# EAGLE board SOIC8 to DIP - Mutliple (EAGLE 6.4), part 1 of 2
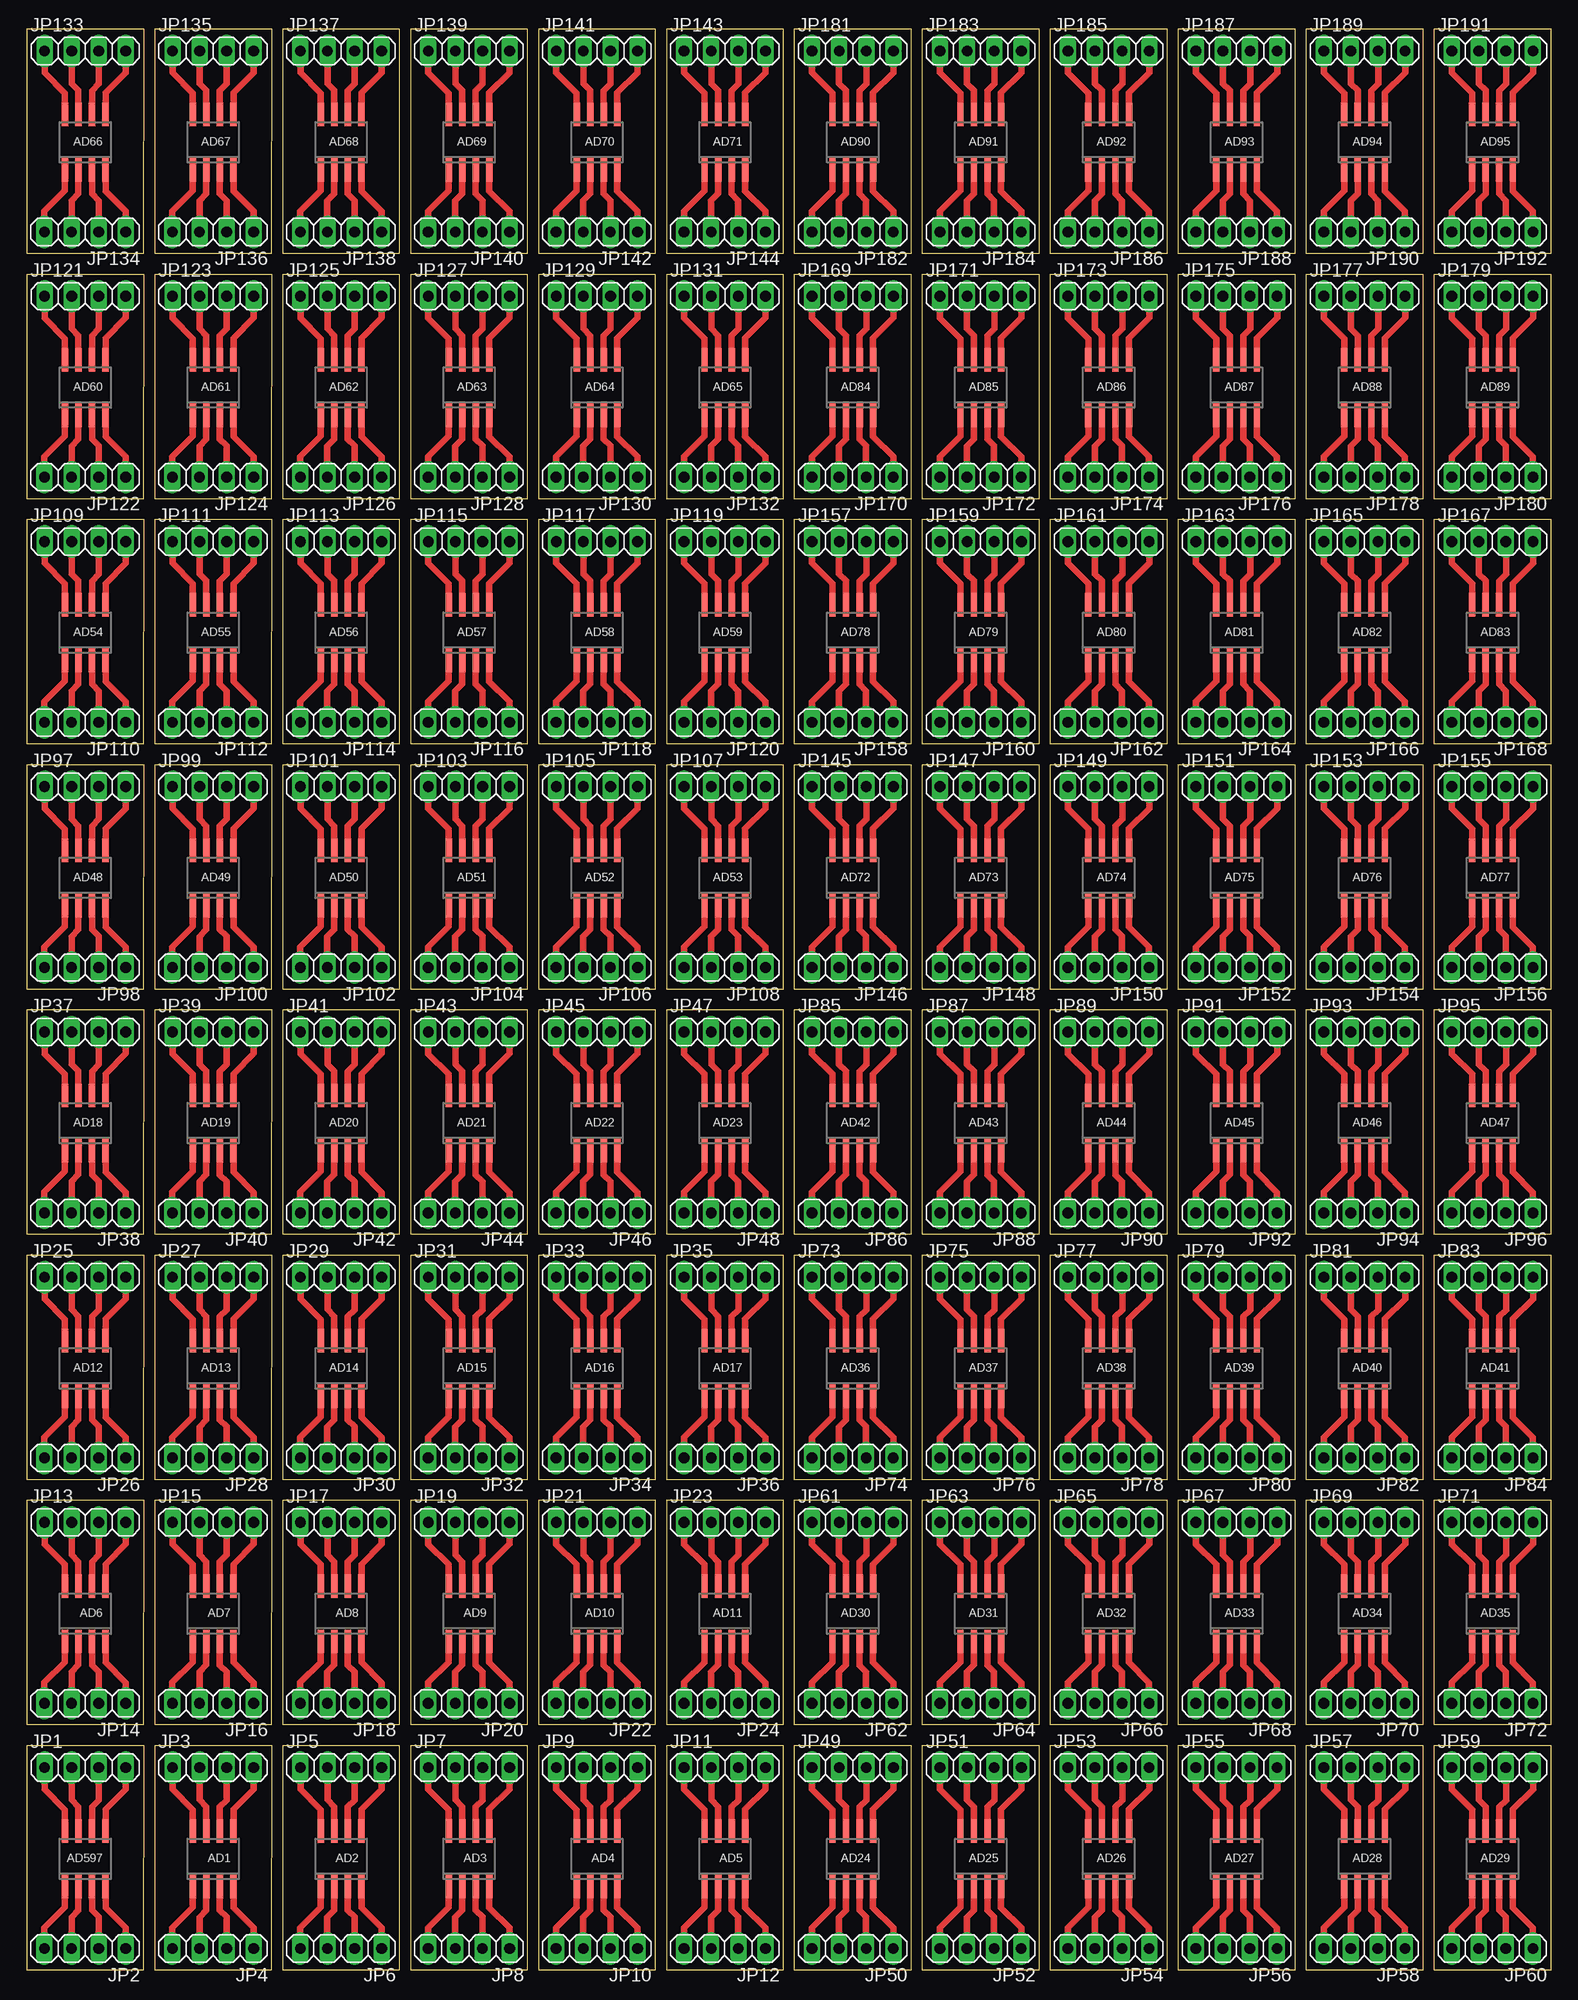
[diagram p0: board, top side]

Size 143.01 x 182 mm. Coordinates in mm from the lower left corner, seen from the top.
Outline: 0,0 11,0 11.01,21 0,21 0,0
Outline: 12,0 23,0 23.01,21 12,21 12,0
Outline: 24,0 35,0 35.01,21 24,21 24,0
Outline: 36,0 47,0 47.01,21 36,21 36,0
Outline: 48,0 59,0 59.01,21 48,21 48,0
Outline: 60,0 71,0 71.01,21 60,21 60,0
Outline: 0,23 11,23 11.01,44 0,44 0,23
Outline: 12,23 23,23 23.01,44 12,44 12,23
Outline: 24,23 35,23 35.01,44 24,44 24,23
Outline: 36,23 47,23 47.01,44 36,44 36,23
Outline: 48,23 59,23 59.01,44 48,44 48,23
Outline: 60,23 71,23 71.01,44 60,44 60,23
Outline: 0,46 11,46 11.01,67 0,67 0,46
Outline: 12,46 23,46 23.01,67 12,67 12,46
Outline: 24,46 35,46 35.01,67 24,67 24,46
Outline: 36,46 47,46 47.01,67 36,67 36,46
Outline: 48,46 59,46 59.01,67 48,67 48,46
Outline: 60,46 71,46 71.01,67 60,67 60,46
Outline: 0,69 11,69 11.01,90 0,90 0,69
Outline: 12,69 23,69 23.01,90 12,90 12,69
Outline: 24,69 35,69 35.01,90 24,90 24,69
Outline: 36,69 47,69 47.01,90 36,90 36,69
Outline: 48,69 59,69 59.01,90 48,90 48,69
Outline: 60,69 71,69 71.01,90 60,90 60,69
Outline: 72,0 83,0 83.01,21 72,21 72,0
Outline: 84,0 95,0 95.01,21 84,21 84,0
Outline: 96,0 107,0 107.01,21 96,21 96,0
Outline: 108,0 119,0 119.01,21 108,21 108,0
Outline: 120,0 131,0 131.01,21 120,21 120,0
Outline: 132,0 143,0 143.01,21 132,21 132,0
Outline: 72,23 83,23 83.01,44 72,44 72,23
Outline: 84,23 95,23 95.01,44 84,44 84,23
Outline: 96,23 107,23 107.01,44 96,44 96,23
Outline: 108,23 119,23 119.01,44 108,44 108,23
Outline: 120,23 131,23 131.01,44 120,44 120,23
Outline: 132,23 143,23 143.01,44 132,44 132,23
Outline: 72,46 83,46 83.01,67 72,67 72,46
Outline: 84,46 95,46 95.01,67 84,67 84,46
Outline: 96,46 107,46 107.01,67 96,67 96,46
Outline: 108,46 119,46 119.01,67 108,67 108,46
Outline: 120,46 131,46 131.01,67 120,67 120,46
Outline: 132,46 143,46 143.01,67 132,67 132,46
Outline: 72,69 83,69 83.01,90 72,90 72,69
Outline: 84,69 95,69 95.01,90 84,90 84,69
Outline: 96,69 107,69 107.01,90 96,90 96,69
Outline: 108,69 119,69 119.01,90 108,90 108,69
Outline: 120,69 131,69 131.01,90 120,90 120,69
Outline: 132,69 143,69 143.01,90 132,90 132,69
Outline: 0,92 11,92 11.01,113 0,113 0,92
Outline: 12,92 23,92 23.01,113 12,113 12,92
Outline: 24,92 35,92 35.01,113 24,113 24,92
Outline: 36,92 47,92 47.01,113 36,113 36,92
Outline: 48,92 59,92 59.01,113 48,113 48,92
Outline: 60,92 71,92 71.01,113 60,113 60,92
Outline: 0,115 11,115 11.01,136 0,136 0,115
Outline: 12,115 23,115 23.01,136 12,136 12,115
Outline: 24,115 35,115 35.01,136 24,136 24,115
Outline: 36,115 47,115 47.01,136 36,136 36,115
Outline: 48,115 59,115 59.01,136 48,136 48,115
Outline: 60,115 71,115 71.01,136 60,136 60,115
Outline: 0,138 11,138 11.01,159 0,159 0,138
Outline: 12,138 23,138 23.01,159 12,159 12,138
Outline: 24,138 35,138 35.01,159 24,159 24,138
Outline: 36,138 47,138 47.01,159 36,159 36,138
Outline: 48,138 59,138 59.01,159 48,159 48,138
Outline: 60,138 71,138 71.01,159 60,159 60,138
Outline: 0,161 11,161 11.01,182 0,182 0,161
Outline: 12,161 23,161 23.01,182 12,182 12,161
Outline: 24,161 35,161 35.01,182 24,182 24,161
Outline: 36,161 47,161 47.01,182 36,182 36,161
Outline: 48,161 59,161 59.01,182 48,182 48,161
Outline: 60,161 71,161 71.01,182 60,182 60,161
Outline: 72,92 83,92 83.01,113 72,113 72,92
Outline: 84,92 95,92 95.01,113 84,113 84,92
Outline: 96,92 107,92 107.01,113 96,113 96,92
Outline: 108,92 119,92 119.01,113 108,113 108,92
Outline: 120,92 131,92 131.01,113 120,113 120,92
Outline: 132,92 143,92 143.01,113 132,113 132,92
Outline: 72,115 83,115 83.01,136 72,136 72,115
Outline: 84,115 95,115 95.01,136 84,136 84,115
Outline: 96,115 107,115 107.01,136 96,136 96,115
Outline: 108,115 119,115 119.01,136 108,136 108,115
Outline: 120,115 131,115 131.01,136 120,136 120,115
Outline: 132,115 143,115 143.01,136 132,136 132,115
Outline: 72,138 83,138 83.01,159 72,159 72,138
Outline: 84,138 95,138 95.01,159 84,159 84,138
Outline: 96,138 107,138 107.01,159 96,159 96,138
Outline: 108,138 119,138 119.01,159 108,159 108,138
Outline: 120,138 131,138 131.01,159 120,159 120,138
Outline: 132,138 143,138 143.01,159 132,159 132,138
Outline: 72,161 83,161 83.01,182 72,182 72,161
Outline: 84,161 95,161 95.01,182 84,182 84,161
Outline: 96,161 107,161 107.01,182 96,182 96,161
Outline: 108,161 119,161 119.01,182 108,182 108,161
Outline: 120,161 131,161 131.01,182 120,182 120,161
Outline: 132,161 143,161 143.01,182 132,182 132,161
Copper layers (1*16): Top 0.035mm / dielectric 1.5mm / Bottom 0.035mm
Design rules "default": minimum track width 10mil, minimum drill 24mil, track to track 8mil, track to pad 8mil, pad to pad 8mil, via to via 8mil, smd to smd 8mil, copper to edge 40mil, drill to drill 8mil, minimum pad ring 10mil, minimum via ring 8mil, stop-mask expansion 4mil, vias tented up to drill 0mil, thermal gap 10mil

## Footprints (pad centres in the part's own frame; a part is rotated, then mirrored left to right if it is on the bottom)
SO8 = smd 0.6 x 2.2: 1 -1.905,-2.6; 2 -0.635,-2.6; 3 0.635,-2.6; 4 1.905,-2.6; 5 1.905,2.6; 6 0.635,2.6; 7 -0.635,2.6; 8 -1.905,2.6
1X04 = drill 1.016 long: 1 -3.81,0; 2 -1.27,0; 3 1.27,0; 4 3.81,0

## Placement (x,y rotation side)
AD1  AD597  [SO8]  17.49,10.4 0 top
AD2  AD597  [SO8]  29.49,10.4 0 top
AD3  AD597  [SO8]  41.49,10.4 0 top
AD4  AD597  [SO8]  53.49,10.4 0 top
AD5  AD597  [SO8]  65.49,10.4 0 top
AD6  AD597  [SO8]  5.49,33.4 0 top
AD7  AD597  [SO8]  17.49,33.4 0 top
AD8  AD597  [SO8]  29.49,33.4 0 top
AD9  AD597  [SO8]  41.49,33.4 0 top
AD10  AD597  [SO8]  53.49,33.4 0 top
AD11  AD597  [SO8]  65.49,33.4 0 top
AD12  AD597  [SO8]  5.49,56.4 0 top
AD13  AD597  [SO8]  17.49,56.4 0 top
AD14  AD597  [SO8]  29.49,56.4 0 top
AD15  AD597  [SO8]  41.49,56.4 0 top
AD16  AD597  [SO8]  53.49,56.4 0 top
AD17  AD597  [SO8]  65.49,56.4 0 top
AD18  AD597  [SO8]  5.49,79.4 0 top
AD19  AD597  [SO8]  17.49,79.4 0 top
AD20  AD597  [SO8]  29.49,79.4 0 top
AD21  AD597  [SO8]  41.49,79.4 0 top
AD22  AD597  [SO8]  53.49,79.4 0 top
AD23  AD597  [SO8]  65.49,79.4 0 top
AD24  AD597  [SO8]  77.49,10.4 0 top
AD25  AD597  [SO8]  89.49,10.4 0 top
AD26  AD597  [SO8]  101.49,10.4 0 top
AD27  AD597  [SO8]  113.49,10.4 0 top
AD28  AD597  [SO8]  125.49,10.4 0 top
AD29  AD597  [SO8]  137.49,10.4 0 top
AD30  AD597  [SO8]  77.49,33.4 0 top
AD31  AD597  [SO8]  89.49,33.4 0 top
AD32  AD597  [SO8]  101.49,33.4 0 top
AD33  AD597  [SO8]  113.49,33.4 0 top
AD34  AD597  [SO8]  125.49,33.4 0 top
AD35  AD597  [SO8]  137.49,33.4 0 top
AD36  AD597  [SO8]  77.49,56.4 0 top
AD37  AD597  [SO8]  89.49,56.4 0 top
AD38  AD597  [SO8]  101.49,56.4 0 top
AD39  AD597  [SO8]  113.49,56.4 0 top
AD40  AD597  [SO8]  125.49,56.4 0 top
AD41  AD597  [SO8]  137.49,56.4 0 top
AD42  AD597  [SO8]  77.49,79.4 0 top
AD43  AD597  [SO8]  89.49,79.4 0 top
AD44  AD597  [SO8]  101.49,79.4 0 top
AD45  AD597  [SO8]  113.49,79.4 0 top
AD46  AD597  [SO8]  125.49,79.4 0 top
AD47  AD597  [SO8]  137.49,79.4 0 top
AD48  AD597  [SO8]  5.49,102.4 0 top
AD49  AD597  [SO8]  17.49,102.4 0 top
AD50  AD597  [SO8]  29.49,102.4 0 top
AD51  AD597  [SO8]  41.49,102.4 0 top
AD52  AD597  [SO8]  53.49,102.4 0 top
AD53  AD597  [SO8]  65.49,102.4 0 top
AD54  AD597  [SO8]  5.49,125.4 0 top
AD55  AD597  [SO8]  17.49,125.4 0 top
AD56  AD597  [SO8]  29.49,125.4 0 top
AD57  AD597  [SO8]  41.49,125.4 0 top
AD58  AD597  [SO8]  53.49,125.4 0 top
AD59  AD597  [SO8]  65.49,125.4 0 top
AD60  AD597  [SO8]  5.49,148.4 0 top
AD61  AD597  [SO8]  17.49,148.4 0 top
AD62  AD597  [SO8]  29.49,148.4 0 top
AD63  AD597  [SO8]  41.49,148.4 0 top
AD64  AD597  [SO8]  53.49,148.4 0 top
AD65  AD597  [SO8]  65.49,148.4 0 top
AD66  AD597  [SO8]  5.49,171.4 0 top
AD67  AD597  [SO8]  17.49,171.4 0 top
AD68  AD597  [SO8]  29.49,171.4 0 top
AD69  AD597  [SO8]  41.49,171.4 0 top
AD70  AD597  [SO8]  53.49,171.4 0 top
AD71  AD597  [SO8]  65.49,171.4 0 top
AD72  AD597  [SO8]  77.49,102.4 0 top
AD73  AD597  [SO8]  89.49,102.4 0 top
AD74  AD597  [SO8]  101.49,102.4 0 top
AD75  AD597  [SO8]  113.49,102.4 0 top
AD76  AD597  [SO8]  125.49,102.4 0 top
AD77  AD597  [SO8]  137.49,102.4 0 top
AD78  AD597  [SO8]  77.49,125.4 0 top
AD79  AD597  [SO8]  89.49,125.4 0 top
AD80  AD597  [SO8]  101.49,125.4 0 top
AD81  AD597  [SO8]  113.49,125.4 0 top
AD82  AD597  [SO8]  125.49,125.4 0 top
AD83  AD597  [SO8]  137.49,125.4 0 top
AD84  AD597  [SO8]  77.49,148.4 0 top
AD85  AD597  [SO8]  89.49,148.4 0 top
AD86  AD597  [SO8]  101.49,148.4 0 top
AD87  AD597  [SO8]  113.49,148.4 0 top
AD88  AD597  [SO8]  125.49,148.4 0 top
AD89  AD597  [SO8]  137.49,148.4 0 top
AD90  AD597  [SO8]  77.49,171.4 0 top
AD91  AD597  [SO8]  89.49,171.4 0 top
AD92  AD597  [SO8]  101.49,171.4 0 top
AD93  AD597  [SO8]  113.49,171.4 0 top
AD94  AD597  [SO8]  125.49,171.4 0 top
AD95  AD597  [SO8]  137.49,171.4 0 top
AD597  AD597  [SO8]  5.49,10.4 0 top
JP1  [1X04]  5.49,18.96 0 top
JP2  [1X04]  5.48,1.99 180 top
JP3  [1X04]  17.49,18.96 0 top
JP4  [1X04]  17.48,1.99 180 top
JP5  [1X04]  29.49,18.96 0 top
JP6  [1X04]  29.48,1.99 180 top
JP7  [1X04]  41.49,18.96 0 top
JP8  [1X04]  41.48,1.99 180 top
JP9  [1X04]  53.49,18.96 0 top
JP10  [1X04]  53.48,1.99 180 top
JP11  [1X04]  65.49,18.96 0 top
JP12  [1X04]  65.48,1.99 180 top
JP13  [1X04]  5.49,41.96 0 top
JP14  [1X04]  5.48,24.99 180 top
JP15  [1X04]  17.49,41.96 0 top
JP16  [1X04]  17.48,24.99 180 top
JP17  [1X04]  29.49,41.96 0 top
JP18  [1X04]  29.48,24.99 180 top
JP19  [1X04]  41.49,41.96 0 top
JP20  [1X04]  41.48,24.99 180 top
JP21  [1X04]  53.49,41.96 0 top
JP22  [1X04]  53.48,24.99 180 top
JP23  [1X04]  65.49,41.96 0 top
JP24  [1X04]  65.48,24.99 180 top
JP25  [1X04]  5.49,64.96 0 top
JP26  [1X04]  5.48,47.99 180 top
JP27  [1X04]  17.49,64.96 0 top
JP28  [1X04]  17.48,47.99 180 top
JP29  [1X04]  29.49,64.96 0 top
JP30  [1X04]  29.48,47.99 180 top
JP31  [1X04]  41.49,64.96 0 top
JP32  [1X04]  41.48,47.99 180 top
JP33  [1X04]  53.49,64.96 0 top
JP34  [1X04]  53.48,47.99 180 top
JP35  [1X04]  65.49,64.96 0 top
JP36  [1X04]  65.48,47.99 180 top
JP37  [1X04]  5.49,87.96 0 top
JP38  [1X04]  5.48,70.99 180 top
JP39  [1X04]  17.49,87.96 0 top
JP40  [1X04]  17.48,70.99 180 top
JP41  [1X04]  29.49,87.96 0 top
JP42  [1X04]  29.48,70.99 180 top
JP43  [1X04]  41.49,87.96 0 top
JP44  [1X04]  41.48,70.99 180 top
JP45  [1X04]  53.49,87.96 0 top
JP46  [1X04]  53.48,70.99 180 top
JP47  [1X04]  65.49,87.96 0 top
JP48  [1X04]  65.48,70.99 180 top
JP49  [1X04]  77.49,18.96 0 top
JP50  [1X04]  77.48,1.99 180 top
JP51  [1X04]  89.49,18.96 0 top
JP52  [1X04]  89.48,1.99 180 top
JP53  [1X04]  101.49,18.96 0 top
JP54  [1X04]  101.48,1.99 180 top
JP55  [1X04]  113.49,18.96 0 top
JP56  [1X04]  113.48,1.99 180 top
JP57  [1X04]  125.49,18.96 0 top
JP58  [1X04]  125.48,1.99 180 top
JP59  [1X04]  137.49,18.96 0 top
JP60  [1X04]  137.48,1.99 180 top
JP61  [1X04]  77.49,41.96 0 top
JP62  [1X04]  77.48,24.99 180 top
JP63  [1X04]  89.49,41.96 0 top
JP64  [1X04]  89.48,24.99 180 top
JP65  [1X04]  101.49,41.96 0 top
JP66  [1X04]  101.48,24.99 180 top
JP67  [1X04]  113.49,41.96 0 top
JP68  [1X04]  113.48,24.99 180 top
JP69  [1X04]  125.49,41.96 0 top
JP70  [1X04]  125.48,24.99 180 top
JP71  [1X04]  137.49,41.96 0 top
JP72  [1X04]  137.48,24.99 180 top
JP73  [1X04]  77.49,64.96 0 top
JP74  [1X04]  77.48,47.99 180 top
JP75  [1X04]  89.49,64.96 0 top
JP76  [1X04]  89.48,47.99 180 top
JP77  [1X04]  101.49,64.96 0 top
JP78  [1X04]  101.48,47.99 180 top
JP79  [1X04]  113.49,64.96 0 top
JP80  [1X04]  113.48,47.99 180 top
JP81  [1X04]  125.49,64.96 0 top
JP82  [1X04]  125.48,47.99 180 top
JP83  [1X04]  137.49,64.96 0 top
JP84  [1X04]  137.48,47.99 180 top
JP85  [1X04]  77.49,87.96 0 top
JP86  [1X04]  77.48,70.99 180 top
JP87  [1X04]  89.49,87.96 0 top
JP88  [1X04]  89.48,70.99 180 top
JP89  [1X04]  101.49,87.96 0 top
JP90  [1X04]  101.48,70.99 180 top
JP91  [1X04]  113.49,87.96 0 top
JP92  [1X04]  113.48,70.99 180 top
JP93  [1X04]  125.49,87.96 0 top
JP94  [1X04]  125.48,70.99 180 top
JP95  [1X04]  137.49,87.96 0 top
JP96  [1X04]  137.48,70.99 180 top
JP97  [1X04]  5.49,110.96 0 top
JP98  [1X04]  5.48,93.99 180 top
JP99  [1X04]  17.49,110.96 0 top
JP100  [1X04]  17.48,93.99 180 top
JP101  [1X04]  29.49,110.96 0 top
JP102  [1X04]  29.48,93.99 180 top
JP103  [1X04]  41.49,110.96 0 top
JP104  [1X04]  41.48,93.99 180 top
JP105  [1X04]  53.49,110.96 0 top
JP106  [1X04]  53.48,93.99 180 top
JP107  [1X04]  65.49,110.96 0 top
JP108  [1X04]  65.48,93.99 180 top
JP109  [1X04]  5.49,133.96 0 top
JP110  [1X04]  5.48,116.99 180 top
JP111  [1X04]  17.49,133.96 0 top
JP112  [1X04]  17.48,116.99 180 top
JP113  [1X04]  29.49,133.96 0 top
JP114  [1X04]  29.48,116.99 180 top
JP115  [1X04]  41.49,133.96 0 top
JP116  [1X04]  41.48,116.99 180 top
JP117  [1X04]  53.49,133.96 0 top
JP118  [1X04]  53.48,116.99 180 top
JP119  [1X04]  65.49,133.96 0 top
JP120  [1X04]  65.48,116.99 180 top
JP121  [1X04]  5.49,156.96 0 top
JP122  [1X04]  5.48,139.99 180 top
JP123  [1X04]  17.49,156.96 0 top
JP124  [1X04]  17.48,139.99 180 top
JP125  [1X04]  29.49,156.96 0 top
JP126  [1X04]  29.48,139.99 180 top
JP127  [1X04]  41.49,156.96 0 top
JP128  [1X04]  41.48,139.99 180 top
JP129  [1X04]  53.49,156.96 0 top
JP130  [1X04]  53.48,139.99 180 top
JP131  [1X04]  65.49,156.96 0 top
JP132  [1X04]  65.48,139.99 180 top
JP133  [1X04]  5.49,179.96 0 top
JP134  [1X04]  5.48,162.99 180 top
JP135  [1X04]  17.49,179.96 0 top
JP136  [1X04]  17.48,162.99 180 top
JP137  [1X04]  29.49,179.96 0 top
JP138  [1X04]  29.48,162.99 180 top
JP139  [1X04]  41.49,179.96 0 top
JP140  [1X04]  41.48,162.99 180 top
JP141  [1X04]  53.49,179.96 0 top
JP142  [1X04]  53.48,162.99 180 top
JP143  [1X04]  65.49,179.96 0 top
JP144  [1X04]  65.48,162.99 180 top
JP145  [1X04]  77.49,110.96 0 top
JP146  [1X04]  77.48,93.99 180 top
JP147  [1X04]  89.49,110.96 0 top
JP148  [1X04]  89.48,93.99 180 top
JP149  [1X04]  101.49,110.96 0 top
JP150  [1X04]  101.48,93.99 180 top
JP151  [1X04]  113.49,110.96 0 top
JP152  [1X04]  113.48,93.99 180 top
JP153  [1X04]  125.49,110.96 0 top
JP154  [1X04]  125.48,93.99 180 top
JP155  [1X04]  137.49,110.96 0 top
JP156  [1X04]  137.48,93.99 180 top
JP157  [1X04]  77.49,133.96 0 top
JP158  [1X04]  77.48,116.99 180 top
JP159  [1X04]  89.49,133.96 0 top
JP160  [1X04]  89.48,116.99 180 top
JP161  [1X04]  101.49,133.96 0 top
JP162  [1X04]  101.48,116.99 180 top
JP163  [1X04]  113.49,133.96 0 top
JP164  [1X04]  113.48,116.99 180 top
JP165  [1X04]  125.49,133.96 0 top
JP166  [1X04]  125.48,116.99 180 top
JP167  [1X04]  137.49,133.96 0 top
JP168  [1X04]  137.48,116.99 180 top
JP169  [1X04]  77.49,156.96 0 top
JP170  [1X04]  77.48,139.99 180 top
JP171  [1X04]  89.49,156.96 0 top
JP172  [1X04]  89.48,139.99 180 top
JP173  [1X04]  101.49,156.96 0 top
JP174  [1X04]  101.48,139.99 180 top
JP175  [1X04]  113.49,156.96 0 top
JP176  [1X04]  113.48,139.99 180 top
JP177  [1X04]  125.49,156.96 0 top
JP178  [1X04]  125.48,139.99 180 top
JP179  [1X04]  137.49,156.96 0 top
JP180  [1X04]  137.48,139.99 180 top
JP181  [1X04]  77.49,179.96 0 top
JP182  [1X04]  77.48,162.99 180 top
JP183  [1X04]  89.49,179.96 0 top
JP184  [1X04]  89.48,162.99 180 top
JP185  [1X04]  101.49,179.96 0 top
JP186  [1X04]  101.48,162.99 180 top
JP187  [1X04]  113.49,179.96 0 top
JP188  [1X04]  113.48,162.99 180 top
JP189  [1X04]  125.49,179.96 0 top
JP190  [1X04]  125.48,162.99 180 top
JP191  [1X04]  137.49,179.96 0 top
JP192  [1X04]  137.48,162.99 180 top

## Library data of the parts
AD1-AD95 AD597 = analog-devices
JP1-JP192 = pinhead

## Nets
N$1: AD597.1 JP2.4
N$2: AD1.1 JP4.4
N$3: AD597.2 JP2.3
N$4: AD597.3 JP2.2
N$5: AD597.4 JP2.1
N$6: AD1.2 JP4.3
N$7: AD597.6 JP1.3
N$8: AD1.3 JP4.2
N$9: AD1.4 JP4.1
N$10: AD1.6 JP3.3
N$11: AD597.7 JP1.2
N$12: AD597.8 JP1.1
N$13: AD597.5 JP1.4
N$14: AD1.7 JP3.2
N$15: AD1.8 JP3.1
N$16: AD1.5 JP3.4
N$17: AD2.1 JP6.4
N$18: AD2.2 JP6.3
N$19: AD2.3 JP6.2
N$20: AD2.4 JP6.1
N$21: AD2.6 JP5.3
N$22: AD2.7 JP5.2
N$23: AD2.8 JP5.1
N$24: AD2.5 JP5.4
N$25: AD3.1 JP8.4
N$26: AD3.2 JP8.3
N$27: AD3.3 JP8.2
N$28: AD3.4 JP8.1
N$29: AD3.6 JP7.3
N$30: AD3.7 JP7.2
N$31: AD3.8 JP7.1
N$32: AD3.5 JP7.4
N$33: AD4.1 JP10.4
N$34: AD4.2 JP10.3
N$35: AD4.3 JP10.2
N$36: AD4.4 JP10.1
N$37: AD4.6 JP9.3
N$38: AD4.7 JP9.2
N$39: AD4.8 JP9.1
N$40: AD4.5 JP9.4
N$41: AD5.1 JP12.4
N$42: AD5.2 JP12.3
N$43: AD5.3 JP12.2
N$44: AD5.4 JP12.1
N$45: AD5.6 JP11.3
N$46: AD5.7 JP11.2
N$47: AD5.8 JP11.1
N$48: AD5.5 JP11.4
N$49: AD6.1 JP14.4
N$50: AD6.2 JP14.3
N$51: AD6.3 JP14.2
N$52: AD6.4 JP14.1
N$53: AD6.6 JP13.3
N$54: AD6.7 JP13.2
N$55: AD6.8 JP13.1
N$56: AD6.5 JP13.4
N$57: AD7.1 JP16.4
N$58: AD7.2 JP16.3
N$59: AD7.3 JP16.2
N$60: AD7.4 JP16.1
N$61: AD7.6 JP15.3
N$62: AD7.7 JP15.2
N$63: AD7.8 JP15.1
N$64: AD7.5 JP15.4
N$65: AD8.1 JP18.4
N$66: AD8.2 JP18.3
N$67: AD8.3 JP18.2
N$68: AD8.4 JP18.1
N$69: AD8.6 JP17.3
N$70: AD8.7 JP17.2
N$71: AD8.8 JP17.1
N$72: AD8.5 JP17.4
N$73: AD9.1 JP20.4
N$74: AD9.2 JP20.3
N$75: AD9.3 JP20.2
N$76: AD9.4 JP20.1
N$77: AD9.6 JP19.3
N$78: AD9.7 JP19.2
N$79: AD9.8 JP19.1
N$80: AD9.5 JP19.4
N$81: AD10.1 JP22.4
N$82: AD10.2 JP22.3
N$83: AD10.3 JP22.2
N$84: AD10.4 JP22.1
N$85: AD10.6 JP21.3
N$86: AD10.7 JP21.2
N$87: AD10.8 JP21.1
N$88: AD10.5 JP21.4
N$89: AD11.1 JP24.4
N$90: AD11.2 JP24.3
N$91: AD11.3 JP24.2
N$92: AD11.4 JP24.1
N$93: AD11.6 JP23.3
N$94: AD11.7 JP23.2
N$95: AD11.8 JP23.1
N$96: AD11.5 JP23.4
N$97: AD12.1 JP26.4
N$98: AD12.2 JP26.3
N$99: AD12.3 JP26.2
N$100: AD12.4 JP26.1
N$101: AD12.6 JP25.3
N$102: AD12.7 JP25.2
N$103: AD12.8 JP25.1
N$104: AD12.5 JP25.4
N$105: AD13.1 JP28.4
N$106: AD13.2 JP28.3
N$107: AD13.3 JP28.2
N$108: AD13.4 JP28.1
N$109: AD13.6 JP27.3
N$110: AD13.7 JP27.2
N$111: AD13.8 JP27.1
N$112: AD13.5 JP27.4
N$113: AD14.1 JP30.4
N$114: AD14.2 JP30.3
N$115: AD14.3 JP30.2
N$116: AD14.4 JP30.1
N$117: AD14.6 JP29.3
N$118: AD14.7 JP29.2
N$119: AD14.8 JP29.1
N$120: AD14.5 JP29.4
N$121: AD15.1 JP32.4
N$122: AD15.2 JP32.3
N$123: AD15.3 JP32.2
N$124: AD15.4 JP32.1
N$125: AD15.6 JP31.3
N$126: AD15.7 JP31.2
N$127: AD15.8 JP31.1
N$128: AD15.5 JP31.4
N$129: AD16.1 JP34.4
N$130: AD16.2 JP34.3
N$131: AD16.3 JP34.2
N$132: AD16.4 JP34.1
N$133: AD16.6 JP33.3
N$134: AD16.7 JP33.2
N$135: AD16.8 JP33.1
N$136: AD16.5 JP33.4
N$137: AD17.1 JP36.4
N$138: AD17.2 JP36.3
N$139: AD17.3 JP36.2
N$140: AD17.4 JP36.1
N$141: AD17.6 JP35.3
N$142: AD17.7 JP35.2
N$143: AD17.8 JP35.1
N$144: AD17.5 JP35.4
N$145: AD18.1 JP38.4
N$146: AD18.2 JP38.3
N$147: AD18.3 JP38.2
N$148: AD18.4 JP38.1
N$149: AD18.6 JP37.3
N$150: AD18.7 JP37.2
N$151: AD18.8 JP37.1
N$152: AD18.5 JP37.4
N$153: AD19.1 JP40.4
N$154: AD19.2 JP40.3
N$155: AD19.3 JP40.2
N$156: AD19.4 JP40.1
N$157: AD19.6 JP39.3
N$158: AD19.7 JP39.2
N$159: AD19.8 JP39.1
N$160: AD19.5 JP39.4
N$161: AD20.1 JP42.4
N$162: AD20.2 JP42.3
N$163: AD20.3 JP42.2
N$164: AD20.4 JP42.1
N$165: AD20.6 JP41.3
N$166: AD20.7 JP41.2
N$167: AD20.8 JP41.1
N$168: AD20.5 JP41.4
N$169: AD21.1 JP44.4
N$170: AD21.2 JP44.3
N$171: AD21.3 JP44.2
N$172: AD21.4 JP44.1
N$173: AD21.6 JP43.3
N$174: AD21.7 JP43.2
N$175: AD21.8 JP43.1
N$176: AD21.5 JP43.4
N$177: AD22.1 JP46.4
N$178: AD22.2 JP46.3
N$179: AD22.3 JP46.2
N$180: AD22.4 JP46.1
N$181: AD22.6 JP45.3
N$182: AD22.7 JP45.2
N$183: AD22.8 JP45.1
N$184: AD22.5 JP45.4
N$185: AD23.1 JP48.4
N$186: AD23.2 JP48.3
N$187: AD23.3 JP48.2
N$188: AD23.4 JP48.1
N$189: AD23.6 JP47.3
N$190: AD23.7 JP47.2
N$191: AD23.8 JP47.1
N$192: AD23.5 JP47.4
N$193: AD24.1 JP50.4
N$194: AD24.2 JP50.3
N$195: AD24.3 JP50.2
N$196: AD24.4 JP50.1
N$197: AD24.6 JP49.3
N$198: AD24.7 JP49.2
N$199: AD24.8 JP49.1
N$200: AD24.5 JP49.4
N$201: AD25.1 JP52.4
N$202: AD25.2 JP52.3
N$203: AD25.3 JP52.2
N$204: AD25.4 JP52.1
N$205: AD25.6 JP51.3
N$206: AD25.7 JP51.2
N$207: AD25.8 JP51.1
N$208: AD25.5 JP51.4
N$209: AD26.1 JP54.4
N$210: AD26.2 JP54.3
N$211: AD26.3 JP54.2
N$212: AD26.4 JP54.1
N$213: AD26.6 JP53.3
N$214: AD26.7 JP53.2
N$215: AD26.8 JP53.1
N$216: AD26.5 JP53.4
N$217: AD27.1 JP56.4
N$218: AD27.2 JP56.3
N$219: AD27.3 JP56.2
N$220: AD27.4 JP56.1
N$221: AD27.6 JP55.3
N$222: AD27.7 JP55.2
N$223: AD27.8 JP55.1
N$224: AD27.5 JP55.4
N$225: AD28.1 JP58.4
N$226: AD28.2 JP58.3
N$227: AD28.3 JP58.2
N$228: AD28.4 JP58.1
N$229: AD28.6 JP57.3
N$230: AD28.7 JP57.2
N$231: AD28.8 JP57.1
N$232: AD28.5 JP57.4
N$233: AD29.1 JP60.4
N$234: AD29.2 JP60.3
N$235: AD29.3 JP60.2
N$236: AD29.4 JP60.1
N$237: AD29.6 JP59.3
N$238: AD29.7 JP59.2
N$239: AD29.8 JP59.1
N$240: AD29.5 JP59.4
N$241: AD30.1 JP62.4
N$242: AD30.2 JP62.3
N$243: AD30.3 JP62.2
N$244: AD30.4 JP62.1
N$245: AD30.6 JP61.3
N$246: AD30.7 JP61.2
N$247: AD30.8 JP61.1
N$248: AD30.5 JP61.4
N$249: AD31.1 JP64.4
N$250: AD31.2 JP64.3
N$251: AD31.3 JP64.2
N$252: AD31.4 JP64.1
N$253: AD31.6 JP63.3
N$254: AD31.7 JP63.2
N$255: AD31.8 JP63.1
N$256: AD31.5 JP63.4
N$257: AD32.1 JP66.4
N$258: AD32.2 JP66.3
N$259: AD32.3 JP66.2
N$260: AD32.4 JP66.1
N$261: AD32.6 JP65.3
N$262: AD32.7 JP65.2
N$263: AD32.8 JP65.1
N$264: AD32.5 JP65.4
N$265: AD33.1 JP68.4
N$266: AD33.2 JP68.3
N$267: AD33.3 JP68.2
N$268: AD33.4 JP68.1
N$269: AD33.6 JP67.3
N$270: AD33.7 JP67.2
N$271: AD33.8 JP67.1
N$272: AD33.5 JP67.4
N$273: AD34.1 JP70.4
N$274: AD34.2 JP70.3
N$275: AD34.3 JP70.2
N$276: AD34.4 JP70.1
N$277: AD34.6 JP69.3
N$278: AD34.7 JP69.2
N$279: AD34.8 JP69.1
N$280: AD34.5 JP69.4
N$281: AD35.1 JP72.4
N$282: AD35.2 JP72.3
N$283: AD35.3 JP72.2
N$284: AD35.4 JP72.1
N$285: AD35.6 JP71.3
N$286: AD35.7 JP71.2
N$287: AD35.8 JP71.1
N$288: AD35.5 JP71.4
N$289: AD36.1 JP74.4
N$290: AD36.2 JP74.3
N$291: AD36.3 JP74.2
N$292: AD36.4 JP74.1
N$293: AD36.6 JP73.3
N$294: AD36.7 JP73.2
N$295: AD36.8 JP73.1
N$296: AD36.5 JP73.4
N$297: AD37.1 JP76.4
N$298: AD37.2 JP76.3
N$299: AD37.3 JP76.2
N$300: AD37.4 JP76.1
N$301: AD37.6 JP75.3
N$302: AD37.7 JP75.2
N$303: AD37.8 JP75.1
N$304: AD37.5 JP75.4
N$305: AD38.1 JP78.4
N$306: AD38.2 JP78.3
N$307: AD38.3 JP78.2
N$308: AD38.4 JP78.1
N$309: AD38.6 JP77.3
N$310: AD38.7 JP77.2
N$311: AD38.8 JP77.1
N$312: AD38.5 JP77.4
N$313: AD39.1 JP80.4
N$314: AD39.2 JP80.3
N$315: AD39.3 JP80.2
N$316: AD39.4 JP80.1
N$317: AD39.6 JP79.3
N$318: AD39.7 JP79.2
N$319: AD39.8 JP79.1
N$320: AD39.5 JP79.4
N$321: AD40.1 JP82.4
N$322: AD40.2 JP82.3
N$323: AD40.3 JP82.2
N$324: AD40.4 JP82.1
N$325: AD40.6 JP81.3
N$326: AD40.7 JP81.2
N$327: AD40.8 JP81.1
N$328: AD40.5 JP81.4
N$329: AD41.1 JP84.4
N$330: AD41.2 JP84.3
N$331: AD41.3 JP84.2
N$332: AD41.4 JP84.1
N$333: AD41.6 JP83.3
N$334: AD41.7 JP83.2
N$335: AD41.8 JP83.1
N$336: AD41.5 JP83.4
N$337: AD42.1 JP86.4
N$338: AD42.2 JP86.3
N$339: AD42.3 JP86.2
N$340: AD42.4 JP86.1
N$341: AD42.6 JP85.3
N$342: AD42.7 JP85.2
N$343: AD42.8 JP85.1
N$344: AD42.5 JP85.4
N$345: AD43.1 JP88.4
N$346: AD43.2 JP88.3
N$347: AD43.3 JP88.2
N$348: AD43.4 JP88.1
N$349: AD43.6 JP87.3
N$350: AD43.7 JP87.2
N$351: AD43.8 JP87.1
N$352: AD43.5 JP87.4
N$353: AD44.1 JP90.4
N$354: AD44.2 JP90.3
N$355: AD44.3 JP90.2
N$356: AD44.4 JP90.1
N$357: AD44.6 JP89.3
N$358: AD44.7 JP89.2
N$359: AD44.8 JP89.1
N$360: AD44.5 JP89.4
N$361: AD45.1 JP92.4
N$362: AD45.2 JP92.3
N$363: AD45.3 JP92.2
N$364: AD45.4 JP92.1
N$365: AD45.6 JP91.3
N$366: AD45.7 JP91.2
N$367: AD45.8 JP91.1
N$368: AD45.5 JP91.4
N$369: AD46.1 JP94.4
N$370: AD46.2 JP94.3
N$371: AD46.3 JP94.2
N$372: AD46.4 JP94.1
N$373: AD46.6 JP93.3
N$374: AD46.7 JP93.2
N$375: AD46.8 JP93.1
N$376: AD46.5 JP93.4
N$377: AD47.1 JP96.4
N$378: AD47.2 JP96.3
N$379: AD47.3 JP96.2
N$380: AD47.4 JP96.1
N$381: AD47.6 JP95.3
N$382: AD47.7 JP95.2
N$383: AD47.8 JP95.1
N$384: AD47.5 JP95.4
N$385: AD48.1 JP98.4
N$386: AD48.2 JP98.3
N$387: AD48.3 JP98.2
N$388: AD48.4 JP98.1
N$389: AD48.6 JP97.3
N$390: AD48.7 JP97.2
N$391: AD48.8 JP97.1
N$392: AD48.5 JP97.4
N$393: AD49.1 JP100.4
N$394: AD49.2 JP100.3
N$395: AD49.3 JP100.2
N$396: AD49.4 JP100.1
N$397: AD49.6 JP99.3
N$398: AD49.7 JP99.2
N$399: AD49.8 JP99.1
N$400: AD49.5 JP99.4
N$401: AD50.1 JP102.4
N$402: AD50.2 JP102.3
N$403: AD50.3 JP102.2
N$404: AD50.4 JP102.1
N$405: AD50.6 JP101.3
N$406: AD50.7 JP101.2
N$407: AD50.8 JP101.1
N$408: AD50.5 JP101.4
N$409: AD51.1 JP104.4
N$410: AD51.2 JP104.3
N$411: AD51.3 JP104.2
N$412: AD51.4 JP104.1
N$413: AD51.6 JP103.3
N$414: AD51.7 JP103.2
N$415: AD51.8 JP103.1
N$416: AD51.5 JP103.4
N$417: AD52.1 JP106.4
N$418: AD52.2 JP106.3
N$419: AD52.3 JP106.2
N$420: AD52.4 JP106.1
N$421: AD52.6 JP105.3
N$422: AD52.7 JP105.2
N$423: AD52.8 JP105.1
N$424: AD52.5 JP105.4
N$425: AD53.1 JP108.4
N$426: AD53.2 JP108.3
N$427: AD53.3 JP108.2
N$428: AD53.4 JP108.1
N$429: AD53.6 JP107.3
N$430: AD53.7 JP107.2
N$431: AD53.8 JP107.1
N$432: AD53.5 JP107.4
N$433: AD54.1 JP110.4
N$434: AD54.2 JP110.3
N$435: AD54.3 JP110.2
N$436: AD54.4 JP110.1
N$437: AD54.6 JP109.3
N$438: AD54.7 JP109.2
N$439: AD54.8 JP109.1
N$440: AD54.5 JP109.4
N$441: AD55.1 JP112.4
N$442: AD55.2 JP112.3
N$443: AD55.3 JP112.2
N$444: AD55.4 JP112.1
N$445: AD55.6 JP111.3
N$446: AD55.7 JP111.2
N$447: AD55.8 JP111.1
N$448: AD55.5 JP111.4
N$449: AD56.1 JP114.4
N$450: AD56.2 JP114.3
N$451: AD56.3 JP114.2
N$452: AD56.4 JP114.1
N$453: AD56.6 JP113.3
N$454: AD56.7 JP113.2
N$455: AD56.8 JP113.1
N$456: AD56.5 JP113.4
N$457: AD57.1 JP116.4
N$458: AD57.2 JP116.3
N$459: AD57.3 JP116.2
N$460: AD57.4 JP116.1
N$461: AD57.6 JP115.3
N$462: AD57.7 JP115.2
N$463: AD57.8 JP115.1
N$464: AD57.5 JP115.4
N$465: AD58.1 JP118.4
N$466: AD58.2 JP118.3
N$467: AD58.3 JP118.2
N$468: AD58.4 JP118.1
N$469: AD58.6 JP117.3
N$470: AD58.7 JP117.2
N$471: AD58.8 JP117.1
N$472: AD58.5 JP117.4
N$473: AD59.1 JP120.4
N$474: AD59.2 JP120.3
N$475: AD59.3 JP120.2
N$476: AD59.4 JP120.1
N$477: AD59.6 JP119.3
N$478: AD59.7 JP119.2
N$479: AD59.8 JP119.1
N$480: AD59.5 JP119.4
N$481: AD60.1 JP122.4
N$482: AD60.2 JP122.3
N$483: AD60.3 JP122.2
N$484: AD60.4 JP122.1
N$485: AD60.6 JP121.3
N$486: AD60.7 JP121.2
N$487: AD60.8 JP121.1
N$488: AD60.5 JP121.4
N$489: AD61.1 JP124.4
N$490: AD61.2 JP124.3
N$491: AD61.3 JP124.2
N$492: AD61.4 JP124.1
N$493: AD61.6 JP123.3
N$494: AD61.7 JP123.2
N$495: AD61.8 JP123.1
N$496: AD61.5 JP123.4
N$497: AD62.1 JP126.4
N$498: AD62.2 JP126.3
N$499: AD62.3 JP126.2
N$500: AD62.4 JP126.1
N$501: AD62.6 JP125.3
N$502: AD62.7 JP125.2
N$503: AD62.8 JP125.1
N$504: AD62.5 JP125.4
N$505: AD63.1 JP128.4
N$506: AD63.2 JP128.3
N$507: AD63.3 JP128.2
N$508: AD63.4 JP128.1
N$509: AD63.6 JP127.3
N$510: AD63.7 JP127.2
N$511: AD63.8 JP127.1
N$512: AD63.5 JP127.4
N$513: AD64.1 JP130.4
N$514: AD64.2 JP130.3
N$515: AD64.3 JP130.2
N$516: AD64.4 JP130.1
N$517: AD64.6 JP129.3
N$518: AD64.7 JP129.2
N$519: AD64.8 JP129.1
N$520: AD64.5 JP129.4
N$521: AD65.1 JP132.4
N$522: AD65.2 JP132.3
N$523: AD65.3 JP132.2
N$524: AD65.4 JP132.1
N$525: AD65.6 JP131.3
N$526: AD65.7 JP131.2
N$527: AD65.8 JP131.1
N$528: AD65.5 JP131.4
N$529: AD66.1 JP134.4
N$530: AD66.2 JP134.3
N$531: AD66.3 JP134.2
N$532: AD66.4 JP134.1
N$533: AD66.6 JP133.3
N$534: AD66.7 JP133.2
N$535: AD66.8 JP133.1
N$536: AD66.5 JP133.4
N$537: AD67.1 JP136.4
N$538: AD67.2 JP136.3
N$539: AD67.3 JP136.2
N$540: AD67.4 JP136.1
N$541: AD67.6 JP135.3
N$542: AD67.7 JP135.2
N$543: AD67.8 JP135.1
N$544: AD67.5 JP135.4
N$545: AD68.1 JP138.4
N$546: AD68.2 JP138.3
N$547: AD68.3 JP138.2
N$548: AD68.4 JP138.1
N$549: AD68.6 JP137.3
N$550: AD68.7 JP137.2
N$551: AD68.8 JP137.1
N$552: AD68.5 JP137.4
N$553: AD69.1 JP140.4
N$554: AD69.2 JP140.3
N$555: AD69.3 JP140.2
N$556: AD69.4 JP140.1
N$557: AD69.6 JP139.3
N$558: AD69.7 JP139.2
N$559: AD69.8 JP139.1
N$560: AD69.5 JP139.4
N$561: AD70.1 JP142.4
N$562: AD70.2 JP142.3
N$563: AD70.3 JP142.2
N$564: AD70.4 JP142.1
N$565: AD70.6 JP141.3
N$566: AD70.7 JP141.2
N$567: AD70.8 JP141.1
N$568: AD70.5 JP141.4
N$569: AD71.1 JP144.4
N$570: AD71.2 JP144.3
N$571: AD71.3 JP144.2
N$572: AD71.4 JP144.1
N$573: AD71.6 JP143.3
N$574: AD71.7 JP143.2
N$575: AD71.8 JP143.1
N$576: AD71.5 JP143.4
N$577: AD72.1 JP146.4
N$578: AD72.2 JP146.3
N$579: AD72.3 JP146.2
N$580: AD72.4 JP146.1
N$581: AD72.6 JP145.3
N$582: AD72.7 JP145.2
N$583: AD72.8 JP145.1
N$584: AD72.5 JP145.4
N$585: AD73.1 JP148.4
N$586: AD73.2 JP148.3
N$587: AD73.3 JP148.2
N$588: AD73.4 JP148.1
N$589: AD73.6 JP147.3
N$590: AD73.7 JP147.2
N$591: AD73.8 JP147.1
N$592: AD73.5 JP147.4
N$593: AD74.1 JP150.4
N$594: AD74.2 JP150.3
N$595: AD74.3 JP150.2
N$596: AD74.4 JP150.1
N$597: AD74.6 JP149.3
N$598: AD74.7 JP149.2
N$599: AD74.8 JP149.1
N$600: AD74.5 JP149.4
N$601: AD75.1 JP152.4
N$602: AD75.2 JP152.3
N$603: AD75.3 JP152.2
N$604: AD75.4 JP152.1
N$605: AD75.6 JP151.3
N$606: AD75.7 JP151.2
N$607: AD75.8 JP151.1
N$608: AD75.5 JP151.4
N$609: AD76.1 JP154.4
N$610: AD76.2 JP154.3
N$611: AD76.3 JP154.2
N$612: AD76.4 JP154.1
N$613: AD76.6 JP153.3
N$614: AD76.7 JP153.2
N$615: AD76.8 JP153.1
N$616: AD76.5 JP153.4
N$617: AD77.1 JP156.4
N$618: AD77.2 JP156.3
N$619: AD77.3 JP156.2
N$620: AD77.4 JP156.1
N$621: AD77.6 JP155.3
N$622: AD77.7 JP155.2
N$623: AD77.8 JP155.1
N$624: AD77.5 JP155.4
N$625: AD78.1 JP158.4
N$626: AD78.2 JP158.3
N$627: AD78.3 JP158.2
N$628: AD78.4 JP158.1
N$629: AD78.6 JP157.3
N$630: AD78.7 JP157.2
N$631: AD78.8 JP157.1
N$632: AD78.5 JP157.4
N$633: AD79.1 JP160.4
N$634: AD79.2 JP160.3
N$635: AD79.3 JP160.2
N$636: AD79.4 JP160.1
N$637: AD79.6 JP159.3
N$638: AD79.7 JP159.2
N$639: AD79.8 JP159.1
N$640: AD79.5 JP159.4
N$641: AD80.1 JP162.4
N$642: AD80.2 JP162.3
N$643: AD80.3 JP162.2
N$644: AD80.4 JP162.1
N$645: AD80.6 JP161.3
N$646: AD80.7 JP161.2
N$647: AD80.8 JP161.1
N$648: AD80.5 JP161.4
N$649: AD81.1 JP164.4
N$650: AD81.2 JP164.3
N$651: AD81.3 JP164.2
N$652: AD81.4 JP164.1
N$653: AD81.6 JP163.3
N$654: AD81.7 JP163.2
N$655: AD81.8 JP163.1
N$656: AD81.5 JP163.4
N$657: AD82.1 JP166.4
N$658: AD82.2 JP166.3
N$659: AD82.3 JP166.2
N$660: AD82.4 JP166.1
N$661: AD82.6 JP165.3
N$662: AD82.7 JP165.2
N$663: AD82.8 JP165.1
N$664: AD82.5 JP165.4
N$665: AD83.1 JP168.4
N$666: AD83.2 JP168.3
N$667: AD83.3 JP168.2
N$668: AD83.4 JP168.1
N$669: AD83.6 JP167.3
N$670: AD83.7 JP167.2
N$671: AD83.8 JP167.1
N$672: AD83.5 JP167.4
N$673: AD84.1 JP170.4
N$674: AD84.2 JP170.3
N$675: AD84.3 JP170.2
N$676: AD84.4 JP170.1
N$677: AD84.6 JP169.3
N$678: AD84.7 JP169.2
N$679: AD84.8 JP169.1
N$680: AD84.5 JP169.4
N$681: AD85.1 JP172.4
N$682: AD85.2 JP172.3
N$683: AD85.3 JP172.2
N$684: AD85.4 JP172.1
N$685: AD85.6 JP171.3
N$686: AD85.7 JP171.2
N$687: AD85.8 JP171.1
N$688: AD85.5 JP171.4
N$689: AD86.1 JP174.4
N$690: AD86.2 JP174.3
N$691: AD86.3 JP174.2
N$692: AD86.4 JP174.1
N$693: AD86.6 JP173.3
N$694: AD86.7 JP173.2
N$695: AD86.8 JP173.1
N$696: AD86.5 JP173.4
N$697: AD87.1 JP176.4
N$698: AD87.2 JP176.3
N$699: AD87.3 JP176.2
N$700: AD87.4 JP176.1
N$701: AD87.6 JP175.3
N$702: AD87.7 JP175.2
N$703: AD87.8 JP175.1
N$704: AD87.5 JP175.4
N$705: AD88.1 JP178.4
N$706: AD88.2 JP178.3
N$707: AD88.3 JP178.2
N$708: AD88.4 JP178.1
N$709: AD88.6 JP177.3
N$710: AD88.7 JP177.2
N$711: AD88.8 JP177.1
N$712: AD88.5 JP177.4
N$713: AD89.1 JP180.4
N$714: AD89.2 JP180.3
N$715: AD89.3 JP180.2
N$716: AD89.4 JP180.1
N$717: AD89.6 JP179.3
N$718: AD89.7 JP179.2
N$719: AD89.8 JP179.1
N$720: AD89.5 JP179.4
N$721: AD90.1 JP182.4
N$722: AD90.2 JP182.3
N$723: AD90.3 JP182.2
N$724: AD90.4 JP182.1
N$725: AD90.6 JP181.3
N$726: AD90.7 JP181.2
N$727: AD90.8 JP181.1
N$728: AD90.5 JP181.4
N$729: AD91.1 JP184.4
N$730: AD91.2 JP184.3
N$731: AD91.3 JP184.2
N$732: AD91.4 JP184.1
N$733: AD91.6 JP183.3
N$734: AD91.7 JP183.2
N$735: AD91.8 JP183.1
N$736: AD91.5 JP183.4
N$737: AD92.1 JP186.4
N$738: AD92.2 JP186.3
N$739: AD92.3 JP186.2
N$740: AD92.4 JP186.1
N$741: AD92.6 JP185.3
N$742: AD92.7 JP185.2
N$743: AD92.8 JP185.1
N$744: AD92.5 JP185.4
N$745: AD93.1 JP188.4
N$746: AD93.2 JP188.3
N$747: AD93.3 JP188.2
N$748: AD93.4 JP188.1
N$749: AD93.6 JP187.3
N$750: AD93.7 JP187.2
N$751: AD93.8 JP187.1
N$752: AD93.5 JP187.4
N$753: AD94.1 JP190.4
N$754: AD94.2 JP190.3
N$755: AD94.3 JP190.2
N$756: AD94.4 JP190.1
N$757: AD94.6 JP189.3
N$758: AD94.7 JP189.2
N$759: AD94.8 JP189.1
N$760: AD94.5 JP189.4
N$761: AD95.1 JP192.4
N$762: AD95.2 JP192.3
N$763: AD95.3 JP192.2
N$764: AD95.4 JP192.1
N$765: AD95.6 JP191.3
N$766: AD95.7 JP191.2
N$767: AD95.8 JP191.1
N$768: AD95.5 JP191.4